# Altium PCB 32_Electrodes.PcbDoc
Units mm, origin at the board's own origin, x right, y up, seen from the top; angles counter-clockwise.
Board outline 55.12 x 41.02 mm, 2 copper layers (Top Layer, Bottom Layer); 2 components, 0 nets, 68 pads, 0 vias.
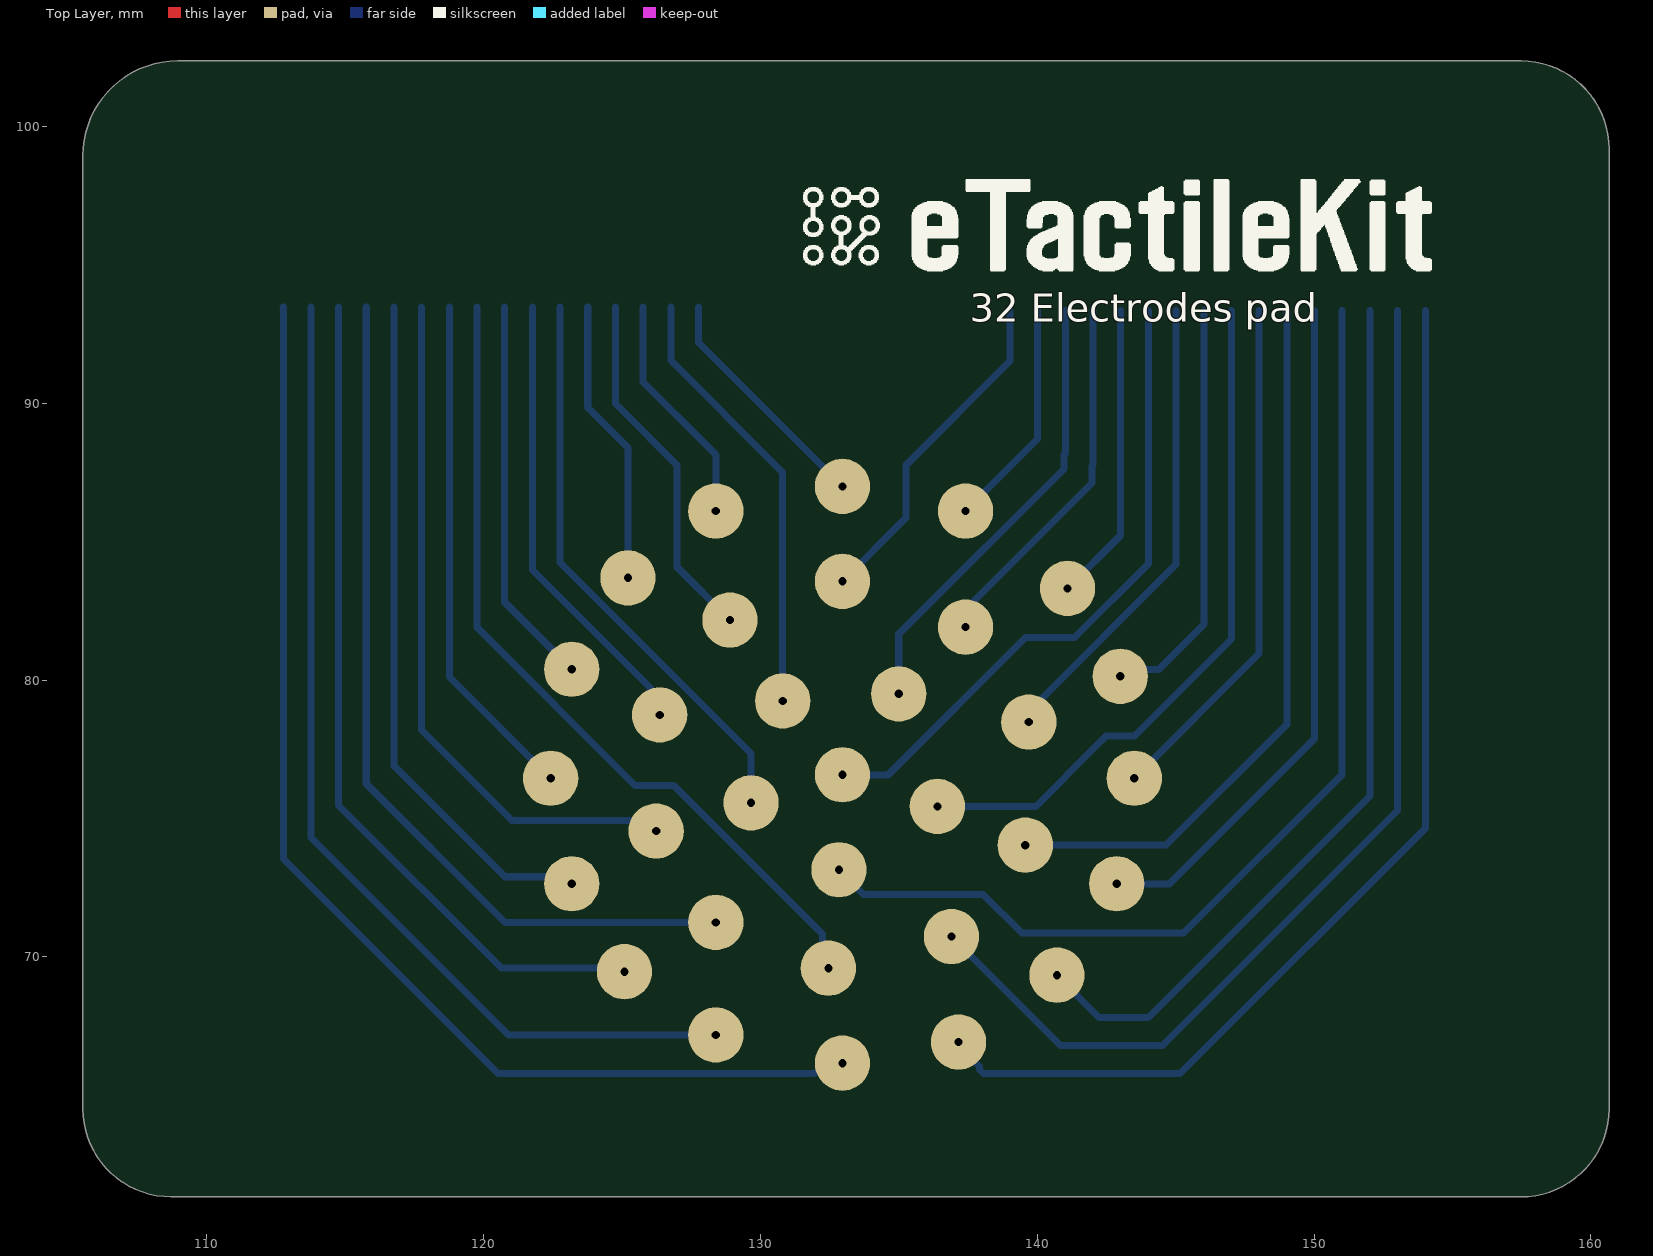
[diagram p0: Top Layer view]
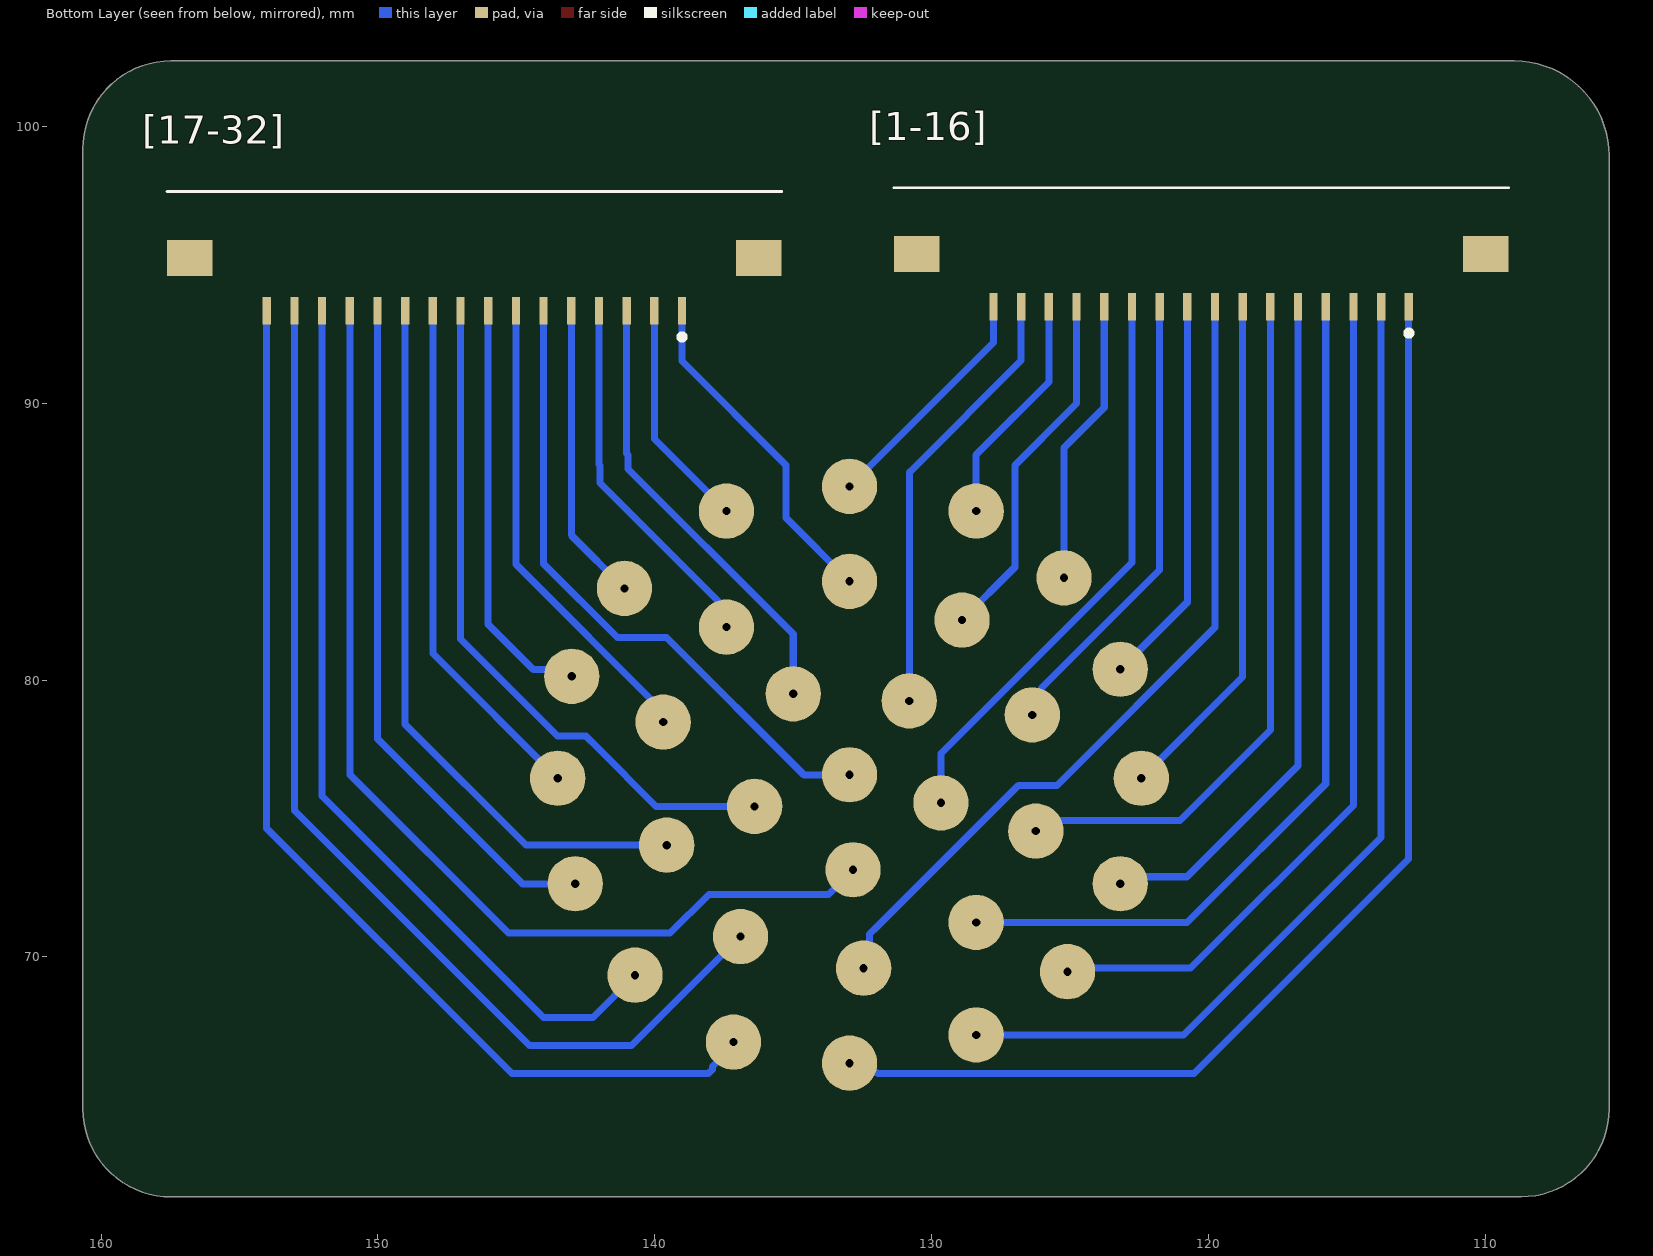
[diagram p1: Bottom Layer view, seen from below]

## Layer stack, top to bottom
Top Solder: solder mask 0.0102, Solder Resist, Dk 3.5
Top Layer: signal copper 0.0356
Dielectric 1: dielectric 0.32, FR-4, Dk 4.8
Bottom Layer: signal copper 0.0356
Bottom Solder: solder mask 0.0102, Solder Resist, Dk 3.5

## Board outline
105.537,64.516 ccw(c108.712,64.516) 108.712,61.341 157.48,61.341 157.48,61.337 ccw(c157.48,64.512) 160.655,64.512 160.655,99.187 ccw(c157.48,99.187) 157.48,102.362 108.96,102.362 ccw(c108.96,98.939) 105.537,98.939

## Design rules (kind name [scope] priority, off if disabled: settings)
Clearance [All] p1: gap=0.254 ignorepadtopadclearanceinfootprint=FALSE
PolygonConnect [All] p1: connectstyle=Relief reliefconductorwidth=0.254 reliefentries=4 polygonreliefangle="90 Angle" airgapwidth=0.254
RoutingVias [All] p1: holewidth=0.711 width=1.27 viastyle="Through Hole" minholewidth=0.711 minwidth=1.27 maxholewidth=0.711 maxwidth=1.27
SolderMaskExpansion [All] p1: expansion=0.102 istentingtop=FALSE
Width [All] p1: maxlimit=0.254 minlimit=0.254 preferedwidth=0.254
30 further rules are at their usual default settings.

## Components (designator, comment, footprint, x,y, rotation, side; value= is the part's Value field where it differs from the comment)
[1-16] "686116183422" 686116183422 120.269,95.631 r0 bottom (schematic designator P1)
[17-32] "686116183422" 686116183422 146.518,95.495 r0 bottom (schematic designator P2)

## Footprints (in the part's own frame and the unit in brackets; to place one, negate y for a bottom-side part, rotate by r counter-clockwise, add the part's x,y. Pads: shape width x height; smd on the part's side, far side on the other; paste and mask are expansions set on the pad)
686116183422 [mm]
  rect 0.3x1 smd: 1(-7.5,2.15) 2(-6.5,2.15) 3(-5.5,2.15) 4(-4.5,2.15) 5(-3.5,2.15) 6(-2.5,2.15) 7(-1.5,2.15) 8(-0.5,2.15) 9(0.5,2.15) 10(1.5,2.15) 11(2.5,2.15) 12(3.5,2.15) 13(4.5,2.15) 14(5.5,2.15) 15(6.5,2.15) 16(7.5,2.15)
  rect 1.65x1.3 smd: MP1(10.275,0.25) MP2(-10.275,0.25)
  silkscreen extent -11.1,-2.15 11.1,3.2, body extent -11.1,-2.15 11.1,2.62, height 1.4

## Part data
[1-16] [17-32]: "Wurth Elektronik WR-FPC Series 1mm Pitch 16 Way Horizontal SMT Female FPC Connector, Top Contact", Manufacturer_Name="Wurth Elektronik", Mouser Part Number=710-686116183422, Datasheet Link=https://componentsearchengine.com/Datasheets/1/686116183422.pdf, Geometry.Height=1.3mm, Manufacturer_Part_Number=686116183422, Mouser Price/Stock=https://www.mouser.co.uk/ProductDetail/Wurth-Elektronik/686116183422?qs=5aG0NVq1C4zMCTkNAYvBmg%3D%3D

## Free pads (board coordinates)
  round 2 hole 0.3: 275(132.969,76.581) 276(130.81,79.248) 277(135.001,79.502) 278(136.398,75.438) 279(132.842,73.152) 280(129.667,75.565) 281(132.969,83.566) 282(139.7,78.486) 283(136.906,70.739) 284(128.397,71.247) 285(126.365,78.74) 286(137.414,81.915) 287(139.573,74.041) 288(132.461,69.596) 289(126.238,74.549) 290(128.905,82.169) 292(132.969,86.995) 293(132.969,66.167) 294(143.51,76.454) 295(122.428,76.454) 296(141.097,83.312) 297(140.716,69.342) 298(125.095,69.469) 299(125.222,83.693) 300(128.397,86.106) 301(137.414,86.106) 302(143.002,80.137) 303(142.875,72.644) 304(137.16,66.929) 305(128.397,67.183) 306(123.19,72.644) 307(123.19,80.391)

## Nets (pads, with @x,y where several pads share a name; then routed paths per layer and width w, separated by ;. In a path a pad name is that pad's centre, name@x,y a point inside that pad or via, vN(x,y) a via of type N, cw(c..) or ccw(c..) an arc to the next point about the centre after c; other vN are vias at no path point)
pads on no net: [1-16].1 [1-16].2 [1-16].3 [1-16].4 [1-16].5 [1-16].6 [1-16].7 [1-16].8 [1-16].9 [1-16].10 [1-16].11 [1-16].12 [1-16].13 [1-16].14 [1-16].15 [1-16].16 [1-16].MP1 [1-16].MP2 [17-32].1 [17-32].2 [17-32].3 [17-32].4 [17-32].5 [17-32].6 [17-32].7 [17-32].8 [17-32].9 [17-32].10 [17-32].11 [17-32].12 [17-32].13 [17-32].14 [17-32].15 [17-32].16 [17-32].MP1 [17-32].MP2
copper on no net: | length 710.7
  Bottom Layer w0.254: 112.769,93.481 112.776,93.474 112.776,73.533 120.523,65.786 131.947,65.786 131.994,65.833 132.635,65.833 132.969,66.167 ; 113.769,93.481 113.769,74.318 120.904,67.183 128.397,67.183 ; 114.769,93.481 114.769,75.477 120.65,69.596 124.968,69.596 125.095,69.469 ; 115.769,93.481 115.769,76.255 120.523,71.501 120.777,71.247 128.397,71.247 ; 116.769,93.481 116.769,76.906 120.777,72.898 122.936,72.898 123.19,72.644 ; 117.769,93.481 117.769,78.192 121.031,74.93 125.857,74.93 126.238,74.549 ; 118.769,93.481 118.769,80.113 122.428,76.454 ; 119.769,93.481 119.769,81.907 125.476,76.2 126.365,76.2 126.873,76.2 131.969,71.104 132.246,70.827 132.246,69.811 132.461,69.596 ; 120.769,93.481 120.769,82.812 123.19,80.391 ; 121.769,93.481 121.769,83.971 126.031,79.709 126.031,79.074 126.365,78.74 ; 122.769,93.481 122.769,84.241 129.667,77.343 129.667,75.565 ; 123.769,93.481 123.769,89.845 123.825,89.789 125.222,88.392 125.222,83.693 ; 124.769,93.481 124.769,89.988 124.968,89.789 127,87.757 127,85.471 127,84.074 128.905,82.169 ; 125.769,93.481 125.769,90.766 128.143,88.392 128.397,88.138 128.397,86.106 ; 126.769,93.481 126.769,91.544 130.683,87.63 130.81,87.503 130.81,79.248 ; 127.769,93.481 127.769,92.195 132.969,86.995 ; 132.842,73.152 133.731,72.263 138.049,72.263 139.446,70.866 141.224,70.866 145.288,70.866 151.018,76.596 151.018,93.345 ; 132.969,76.581 134.62,76.581 139.573,81.534 141.351,81.534 144.018,84.201 144.018,93.345 ; 132.969,83.566 135.255,85.852 135.255,87.757 139.018,91.52 139.018,93.345 ; 135.001,79.502 135.001,81.661 135.382,82.042 140.97,87.63 140.97,88.138 141.018,88.186 141.018,93.345 ; 136.398,75.438 139.954,75.438 142.113,77.597 142.494,77.978 143.51,77.978 147.018,81.486 147.018,93.345 ; 136.906,70.739 140.843,66.802 144.526,66.802 153.018,75.294 153.018,93.345 ; 137.287,66.675 137.922,66.04 137.922,65.935 138.071,65.786 145.161,65.786 145.542,66.167 154.018,74.643 154.018,93.345 ; 137.414,81.915 137.414,82.55 138.303,83.439 141.986,87.122 141.986,87.757 142.018,87.789 142.018,93.345 ; 137.414,86.106 140.018,88.71 140.018,93.345 ; 139.573,74.041 144.653,74.041 149.018,78.406 149.018,93.345 ; 139.7,78.486 139.7,78.867 145.018,84.185 145.018,93.345 ; 140.716,69.342 142.24,67.818 144.018,67.818 152.018,75.818 152.018,93.345 ; 141.097,83.312 143.018,85.233 143.018,93.345 ; 142.875,72.644 144.78,72.644 150.018,77.882 150.018,93.345 ; 143.002,80.137 143.24,80.375 144.383,80.375 146.018,82.01 146.018,93.345 ; 143.51,76.454 148.018,80.962 148.018,93.345

## Silkscreen, mask and mechanical layers (free items; w line width, h text height)
Top Overlay:
  drawing of 18 lines, arcs and shapes, not listed
  text "32 Electrodes pad" at 137.566,92.947 h1.02
Mechanical 1:
  lines w0.254: 157.48,61.337 ccw(c157.48,64.512) 160.655,64.512 160.655,99.187 ccw(c157.48,99.187) 157.48,102.362 108.96,102.362 ccw(c108.96,98.939) 105.537,98.939 105.537,64.516 ccw(c108.712,64.516) 108.712,61.341 157.48,61.341